# Altium PCB Booster2.PcbDoc (part 2 of 2)
Units mm, origin at the board's own origin, x right, y up, seen from the top; angles counter-clockwise.
Board outline 59.06 x 72.51 mm, 2 copper layers (Top Layer, Bottom Layer); 66 components, 45 nets, 178 pads, 206 vias.
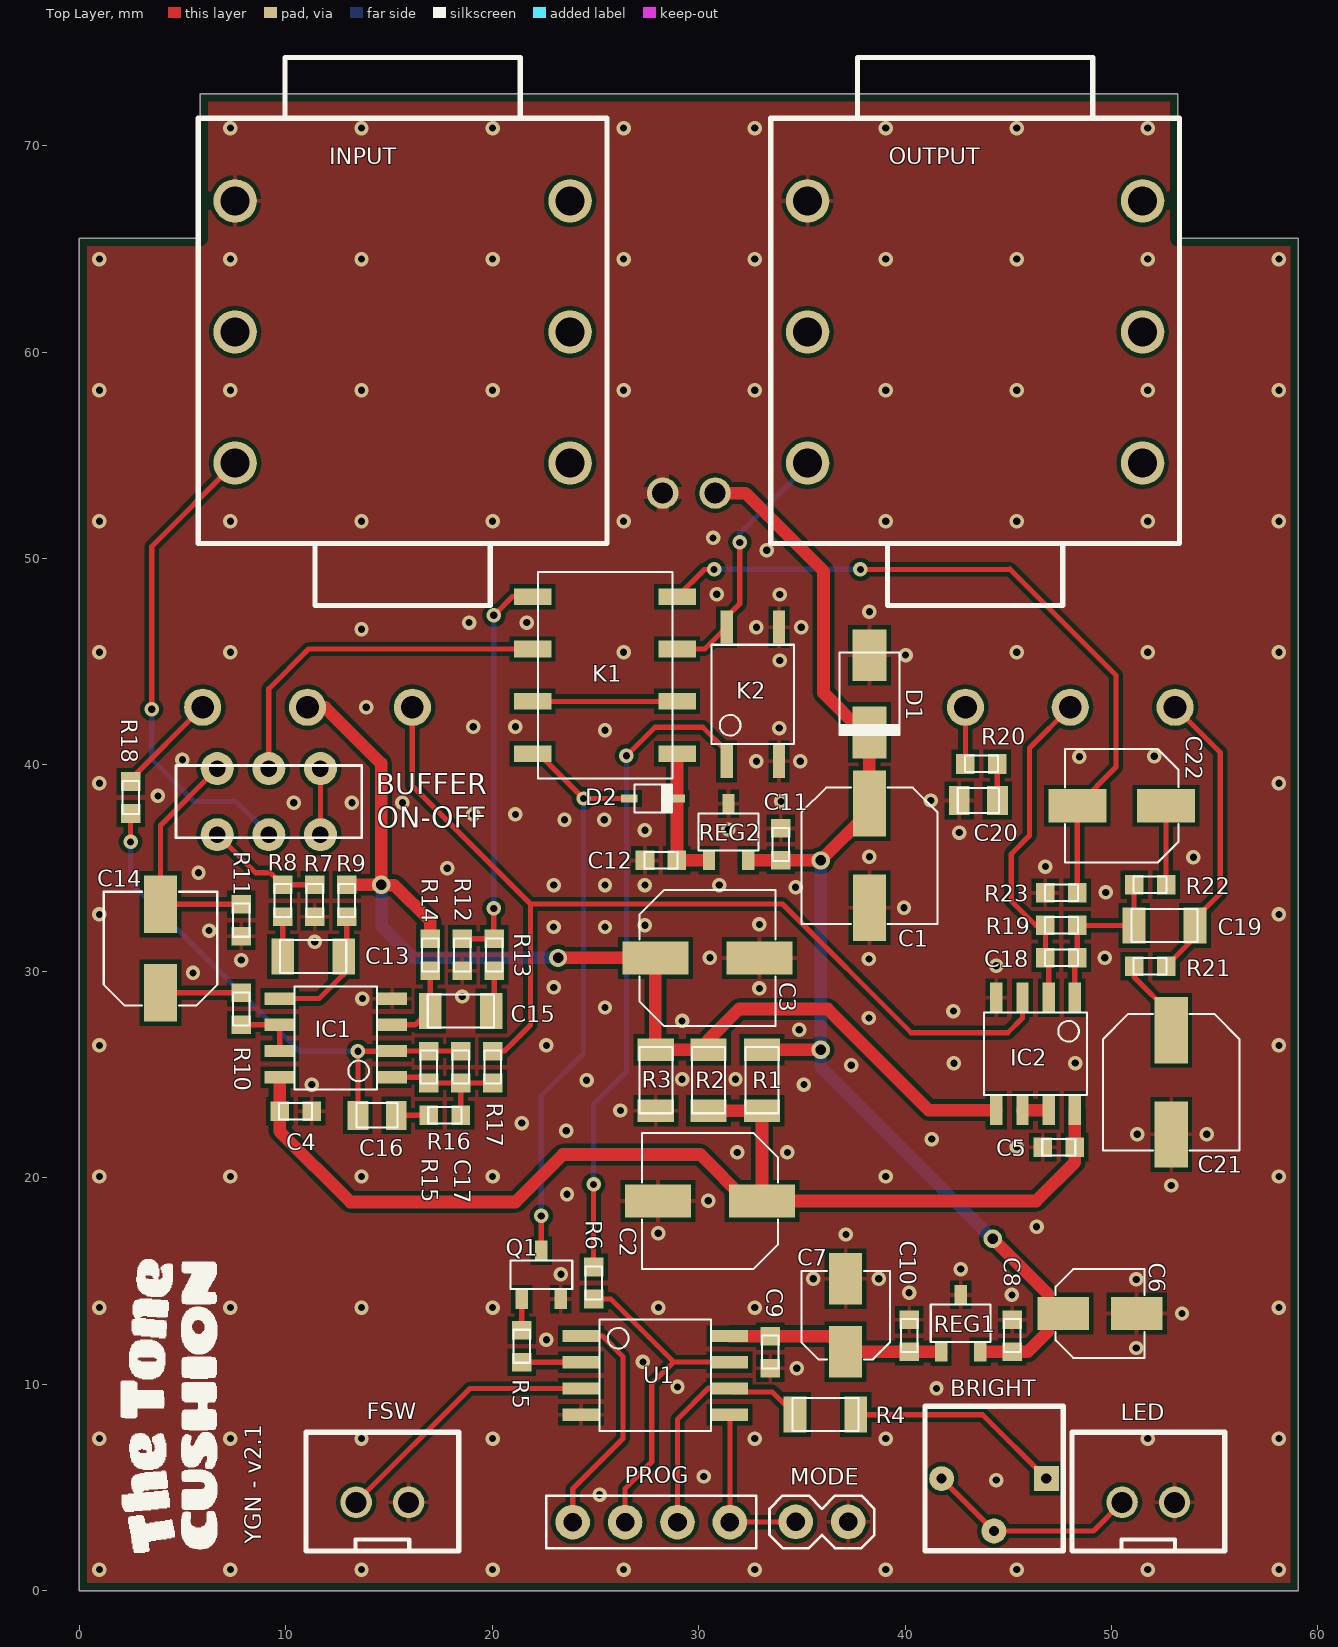
[diagram p0: Top Layer view]

## Part data (continued)
R4: library part CRCW1206220RFKEA, "RES SMD 220 OHM 1% 1/4W 1206", Case/Package=1206, Case Code (Metric)=3216, Manufacturer=Vishay, Max Operating Temperature=155°C, Max Power Dissipation=250mW, Min Operating Temperature=-55°C, Package Quantity=10, Supplier Part Number 1=2139380, Temperature Coefficient=100ppm/°C, Tolerance=1%, Voltage Rating=200V, Case Code (Imperial)=1206, ComponentLink1Description=https://datasheet.ciiva.com/5550/dcrcwe3-109170-5550679.pdf?src-supplier=Mouser, ComponentLink1URL=https://datasheet.ciiva.com/5550/dcrcwe3-109170-5550679.pdf?src-supplier=Mouser, ComponentLink2Description=https://datasheet.ciiva.com/17166/dcrcwe3-17166378.pdf?src-supplier=Avnet+Europe, ComponentLink2URL=https://datasheet.ciiva.com/17166/dcrcwe3-17166378.pdf?src-supplier=Avnet+Europe, ComponentLink3Description=https://datasheet.ciiva.com/2515/dcrcwe3-2515580.pdf?src-supplier=Digi-Key, ComponentLink3URL=https://datasheet.ciiva.com/2515/dcrcwe3-2515580.pdf?src-supplier=Digi-Key, ComponentLink4Description=https://datasheet.ciiva.com/2515/dcrcwe3-2515581.pdf?src-supplier=Digi-Key, ComponentLink4URL=https://datasheet.ciiva.com/2515/dcrcwe3-2515581.pdf?src-supplier=Digi-Key, ComponentLink5Description=https://datasheet.ciiva.com/2515/dcrcwe3-2515582.pdf?src-supplier=Digi-Key, ComponentLink5URL=https://datasheet.ciiva.com/2515/dcrcwe3-2515582.pdf?src-supplier=Digi-Key, ComponentLink6Description=https://datasheet.ciiva.com/8957/dcrcwe3-8957438.pdf?src-supplier=Avnet, ComponentLink6URL=https://datasheet.ciiva.com/8957/dcrcwe3-8957438.pdf?src-supplier=Avnet, ComponentLink7Description=https://datasheet.ciiva.com/22700/1697337-22700367.pdf?src-supplier=Element14, ComponentLink7URL=https://datasheet.ciiva.com/22700/1697337-22700367.pdf?src-supplier=Element14, ComponentLink8Description=https://datasheet.ciiva.com/26317/fld-crcw-e3-data-en-26317129.pdf?src-supplier=Distrelec, ComponentLink8URL=https://datasheet.ciiva.com/26317/fld-crcw-e3-data-en-26317129.pdf?src-supplier=Distrelec, ComponentLink9Description=https://datasheet.ciiva.com/7800/dcrcwe3-7800651.pdf?src-supplier=Element14, ComponentLink9URL=https://datasheet.ciiva.com/7800/dcrcwe3-7800651.pdf?src-supplier=Element14, ComponentLink10Description=https://datasheet.ciiva.com/22675/1912744-22675103.pdf?src-supplier=Element14, ComponentLink10URL=https://datasheet.ciiva.com/22675/1912744-22675103.pdf?src-supplier=Element14, Composition="Thick Film", Contact Plating=Tin, Depth=1.6mm, Features="Automotive AEC-Q200", Height=0.55mm, Lead Free="Lead Free", Length=3.2mm, Manufacturer Part Number=CRCW1206220RFKEA, Military Standard=Not, Mount="Surface Mount", Number of Terminations=2, Packaging="Tape and Reel", Power Rating=250mW, Price=0.028, Pricing="10=0.0415, 100=0.0276, 500=0.0231, 1000=0.0135, 2500=0.0116 (EUR)", Radiation Hardening=No, REACH SVHC=Unknown, Resistance=220R, RoHS=Yes, Stock=47111, Supplier 1=Farnell, Termination=SMD/SMT, Voltage Rating (DC)=200V, Weight=0.000353oz, Width=1.6mm
R5 R18 R19: library part CRCW060320K0FKEA, "RES SMD 20K OHM 1% 1/10W 0603", Case/Package=0603, Case Code (Metric)=1608, Manufacturer=Vishay, Max Operating Temperature=155°C, Min Operating Temperature=-55°C, Package Quantity=5000, Power Rating=100mW, Resistance=20kR, Supplier Part Number 1=1469774, Temperature Coefficient=100ppm/°C, Tolerance=1%, Voltage Rating=75V, Case Code (Imperial)=0603, ComponentLink1Description=https://datasheet.ciiva.com/5549/dcrcwe3-109170-5549626.pdf?src-supplier=Mouser, ComponentLink1URL=https://datasheet.ciiva.com/5549/dcrcwe3-109170-5549626.pdf?src-supplier=Mouser, ComponentLink2Description=https://datasheet.ciiva.com/26314/fld-crcw-e3-data-en-26314665.pdf?src-supplier=Distrelec, ComponentLink2URL=https://datasheet.ciiva.com/26314/fld-crcw-e3-data-en-26314665.pdf?src-supplier=Distrelec, ComponentLink3Description=https://datasheet.ciiva.com/3257/dcrcwe3-3257238.pdf?src-supplier=Avnet, ComponentLink3URL=https://datasheet.ciiva.com/3257/dcrcwe3-3257238.pdf?src-supplier=Avnet, ComponentLink4Description=https://datasheet.ciiva.com/7841/1697337-7841574.pdf?src-supplier=Element14, ComponentLink4URL=https://datasheet.ciiva.com/7841/1697337-7841574.pdf?src-supplier=Element14, ComponentLink5Description=https://datasheet.ciiva.com/3257/dcrcwe3-3257239.pdf?src-supplier=Avnet, ComponentLink5URL=https://datasheet.ciiva.com/3257/dcrcwe3-3257239.pdf?src-supplier=Avnet, ComponentLink6Description=https://datasheet.ciiva.com/16351/dcrcwe3-16351112.pdf?src-supplier=Future+Electronics, ComponentLink6URL=https://datasheet.ciiva.com/16351/dcrcwe3-16351112.pdf?src-supplier=Future+Electronics, ComponentLink7Description=https://datasheet.ciiva.com/16893/dcrcw-16893852.pdf?src-supplier=Avnet+Europe, ComponentLink7URL=https://datasheet.ciiva.com/16893/dcrcw-16893852.pdf?src-supplier=Avnet+Europe, Composition="Thick Film", Contact Plating=Tin, Depth=0.85mm, Height=0.45mm, Lead Free="Lead Free", Length=1.55mm, Manufacturer Part Number=CRCW060320K0FKEA, Military Standard=Not, Mount="Surface Mount", Number of Pins=2, Packaging="Tape and Reel", Price=0.0131, Pricing="10=0.0169, 100=0.013, 500=0.0113, 1000=0.008 (EUR)", Radiation Hardening=No, REACH SVHC=Unknown, RoHS=Yes, Stock=71220, Supplier 1=Farnell, Termination=SMD/SMT, Voltage Rating (DC)=75V, Weight=7.1E-05oz, Width=0.85mm
R6 R10 R22: library part CRCW06031K00FKEA, "RES SMD 1K OHM 1% 1/10W 0603", Case/Package=0603, Case Code (Metric)=1608, Manufacturer="Vishay Dale", Max Operating Temperature=155°C, Max Power Dissipation=100mW, Min Operating Temperature=-55°C, Package Quantity=10, Resistance=1kR, Supplier Part Number 1=1469740, Temperature Coefficient=100ppm/°C, Tolerance=1%, Voltage Rating=75V, Case Code (Imperial)=0603, ComponentLink1Description=https://datasheet.ciiva.com/11808/0900766b80d98afc-11808625.pdf?src-supplier=RSComponents, ComponentLink1URL=https://datasheet.ciiva.com/11808/0900766b80d98afc-11808625.pdf?src-supplier=RSComponents, ComponentLink2Description=https://datasheet.ciiva.com/2465/dcrcwe3-2465536.pdf?src-supplier=Digi-Key, ComponentLink2URL=https://datasheet.ciiva.com/2465/dcrcwe3-2465536.pdf?src-supplier=Digi-Key, ComponentLink3Description=https://datasheet.ciiva.com/8336/dcrcwe3-8336822.pdf?src-supplier=Avnet, ComponentLink3URL=https://datasheet.ciiva.com/8336/dcrcwe3-8336822.pdf?src-supplier=Avnet, ComponentLink4Description=https://datasheet.ciiva.com/16515/dcrcwe3-16515078.pdf?src-supplier=Avnet+Asia, ComponentLink4URL=https://datasheet.ciiva.com/16515/dcrcwe3-16515078.pdf?src-supplier=Avnet+Asia, ComponentLink5Description=https://datasheet.ciiva.com/46441/1720486-46441622.pdf?src-supplier=Element14, ComponentLink5URL=https://datasheet.ciiva.com/46441/1720486-46441622.pdf?src-supplier=Element14, ComponentLink6Description=https://datasheet.ciiva.com/26316/fld-crcw-e3-data-en-26316551.pdf?src-supplier=Distrelec, ComponentLink6URL=https://datasheet.ciiva.com/26316/fld-crcw-e3-data-en-26316551.pdf?src-supplier=Distrelec, ComponentLink7Description=https://datasheet.ciiva.com/46441/1720486-46441623.pdf?src-supplier=Element14, ComponentLink7URL=https://datasheet.ciiva.com/46441/1720486-46441623.pdf?src-supplier=Element14, ComponentLink8Description=https://datasheet.ciiva.com/46385/1697337-46385497.pdf?src-supplier=Element14, ComponentLink8URL=https://datasheet.ciiva.com/46385/1697337-46385497.pdf?src-supplier=Element14, ComponentLink9Description=https://datasheet.ciiva.com/3257/dcrcwe3-3257132.pdf?src-supplier=Avnet, ComponentLink9URL=https://datasheet.ciiva.com/3257/dcrcwe3-3257132.pdf?src-supplier=Avnet, ComponentLink10Description=https://datasheet.ciiva.com/16199/dcrcwe3-16199053.pdf?src-supplier=Future+Electronics, ComponentLink10URL=https://datasheet.ciiva.com/16199/dcrcwe3-16199053.pdf?src-supplier=Future+Electronics, ComponentLink11Description=https://datasheet.ciiva.com/2465/dcrcwe3-2465534.pdf?src-supplier=Digi-Key, ComponentLink11URL=https://datasheet.ciiva.com/2465/dcrcwe3-2465534.pdf?src-supplier=Digi-Key, ComponentLink12Description=https://datasheet.ciiva.com/16893/dcrcwe3-16893742.pdf?src-supplier=Avnet+Europe, ComponentLink12URL=https://datasheet.ciiva.com/16893/dcrcwe3-16893742.pdf?src-supplier=Avnet+Europe, ComponentLink13Description=https://datasheet.ciiva.com/2465/dcrcwe3-2465535.pdf?src-supplier=Digi-Key, ComponentLink13URL=https://datasheet.ciiva.com/2465/dcrcwe3-2465535.pdf?src-supplier=Digi-Key, Composition="Thick Film", Contact Plating=Tin, Depth=0.85mm, Features="Automotive AEC-Q200", Height=0.45mm, Lead Free="Lead Free", Length=1.55mm, Manufacturer Part Number=CRCW06031K00FKEA, Military Standard=Not, Mount="Surface Mount", Number of Pins=2, Number of Terminations=2, Packaging="Tape and Reel", Power Rating=100mW, Price=0.013, Pricing="10=0.017, 100=0.0131, 500=0.0114, 1000=0.008, 2500=0.0061 (EUR)", Radiation Hardening=No, REACH SVHC=Unknown, RoHS=Yes, Stock=1083345, Supplier 1=Farnell, Termination=SMD/SMT, Voltage Rating (DC)=75V, Weight=7.1E-05oz, Width=0.033inch
R7 R9 R12 R14: library part CRCW06032M20FKEA, "RES SMD 2.2M OHM 1% 1/10W 0603", Case/Package=0603, Case Code (Metric)=1608, Manufacturer=Vishay, Max Operating Temperature=155°C, Max Power Dissipation=100mW, Min Operating Temperature=-55°C, Package Quantity=10, Resistance=2.2MR, Supplier Part Number 1=2138646, Temperature Coefficient=100ppm/°C, Tolerance=1%, Voltage Rating=75V, Case Code (Imperial)=0603, ComponentLink1Description=https://datasheet.ciiva.com/11810/0900766b80d98afc-11810588.pdf?src-supplier=RSComponents, ComponentLink1URL=https://datasheet.ciiva.com/11810/0900766b80d98afc-11810588.pdf?src-supplier=RSComponents, ComponentLink2Description=https://datasheet.ciiva.com/2466/dcrcwe3-2466118.pdf?src-supplier=Digi-Key, ComponentLink2URL=https://datasheet.ciiva.com/2466/dcrcwe3-2466118.pdf?src-supplier=Digi-Key, ComponentLink3Description=https://datasheet.ciiva.com/22682/1912744-22682662.pdf?src-supplier=Element14, ComponentLink3URL=https://datasheet.ciiva.com/22682/1912744-22682662.pdf?src-supplier=Element14, ComponentLink4Description=https://datasheet.ciiva.com/7801/1697337-7801067.pdf?src-supplier=Element14, ComponentLink4URL=https://datasheet.ciiva.com/7801/1697337-7801067.pdf?src-supplier=Element14, ComponentLink5Description=https://datasheet.ciiva.com/22869/70201119-22869819.pdf?src-supplier=Allied+Electronics, ComponentLink5URL=https://datasheet.ciiva.com/22869/70201119-22869819.pdf?src-supplier=Allied+Electronics, ComponentLink6Description=https://datasheet.ciiva.com/26314/fld-crcw-e3-data-en-26314653.pdf?src-supplier=Distrelec, ComponentLink6URL=https://datasheet.ciiva.com/26314/fld-crcw-e3-data-en-26314653.pdf?src-supplier=Distrelec, ComponentLink7Description=https://datasheet.ciiva.com/3257/dcrcwe3-3257407.pdf?src-supplier=Avnet, ComponentLink7URL=https://datasheet.ciiva.com/3257/dcrcwe3-3257407.pdf?src-supplier=Avnet, ComponentLink8Description=https://datasheet.ciiva.com/2466/dcrcwe3-2466116.pdf?src-supplier=Digi-Key, ComponentLink8URL=https://datasheet.ciiva.com/2466/dcrcwe3-2466116.pdf?src-supplier=Digi-Key, ComponentLink9Description=https://datasheet.ciiva.com/2466/dcrcwe3-2466117.pdf?src-supplier=Digi-Key, ComponentLink9URL=https://datasheet.ciiva.com/2466/dcrcwe3-2466117.pdf?src-supplier=Digi-Key, ComponentLink10Description=https://datasheet.ciiva.com/16498/dcrcwe3-16498313.pdf?src-supplier=Future+Electronics, ComponentLink10URL=https://datasheet.ciiva.com/16498/dcrcwe3-16498313.pdf?src-supplier=Future+Electronics, ComponentLink11Description=https://datasheet.ciiva.com/7801/1697337-7801066.pdf?src-supplier=Element14, ComponentLink11URL=https://datasheet.ciiva.com/7801/1697337-7801066.pdf?src-supplier=Element14, Composition="Thick Film", Contact Plating=Tin, Depth=0.85mm, Features="Automotive AEC-Q200", Height=0.45mm, Lead Free="Lead Free", Length=1.55mm, Manufacturer Part Number=CRCW06032M20FKEA, Military Standard=Not, Mount="Surface Mount", Number of Pins=2, Number of Terminations=2, Packaging="Tape and Reel", Power Rating=100mW, Price=0.0165, Pricing="10=0.0212, 100=0.0163, 500=0.0141, 1000=0.0073 (EUR)", Radiation Hardening=No, REACH SVHC=Unknown, RoHS=Yes, Stock=19125, Supplier 1=Farnell, Termination=SMD/SMT, Voltage Rating (DC)=75V, Weight=7.1E-05oz, Width=0.85mm
R8 R13: library part CRCW060310K0FKEA, "RES SMD 10K OHM 1% 1/10W 0603", Case/Package=0603, Case Code (Metric)=1608, Manufacturer=Vishay, Max Operating Temperature=155°C, Max Power Dissipation=100mW, Min Operating Temperature=-55°C, Package Quantity=10, Resistance=10kR, Supplier Part Number 1=1469748, Temperature Coefficient=100ppm/°C, Tolerance=1%, Voltage Rating=75V, Case Code (Imperial)=0603, ComponentLink1Description=https://datasheet.ciiva.com/11809/0900766b80d98afc-11809037.pdf?src-supplier=RSComponents, ComponentLink1URL=https://datasheet.ciiva.com/11809/0900766b80d98afc-11809037.pdf?src-supplier=RSComponents, ComponentLink2Description=https://datasheet.ciiva.com/16886/dcrcw-16886037.pdf?src-supplier=Avnet+Europe, ComponentLink2URL=https://datasheet.ciiva.com/16886/dcrcw-16886037.pdf?src-supplier=Avnet+Europe, ComponentLink3Description=https://datasheet.ciiva.com/26821/getdatasheetpartid-86831-26821109.pdf?src-supplier=Verical, ComponentLink3URL=https://datasheet.ciiva.com/26821/getdatasheetpartid-86831-26821109.pdf?src-supplier=Verical, ComponentLink4Description=https://datasheet.ciiva.com/16754/70201119-16754710.pdf?src-supplier=Allied+Electronics, ComponentLink4URL=https://datasheet.ciiva.com/16754/70201119-16754710.pdf?src-supplier=Allied+Electronics, ComponentLink5Description=https://datasheet.ciiva.com/16719/70201119-16719704.pdf?src-supplier=Allied+Electronics, ComponentLink5URL=https://datasheet.ciiva.com/16719/70201119-16719704.pdf?src-supplier=Allied+Electronics, ComponentLink6Description=https://datasheet.ciiva.com/2465/dcrcwe3-2465513.pdf?src-supplier=Digi-Key, ComponentLink6URL=https://datasheet.ciiva.com/2465/dcrcwe3-2465513.pdf?src-supplier=Digi-Key, ComponentLink7Description=https://datasheet.ciiva.com/5543/dcrcwe3-109170-5543001.pdf?src-supplier=Mouser, ComponentLink7URL=https://datasheet.ciiva.com/5543/dcrcwe3-109170-5543001.pdf?src-supplier=Mouser, ComponentLink8Description=https://datasheet.ciiva.com/2465/dcrcwe3-2465514.pdf?src-supplier=Digi-Key, ComponentLink8URL=https://datasheet.ciiva.com/2465/dcrcwe3-2465514.pdf?src-supplier=Digi-Key, ComponentLink9Description=https://datasheet.ciiva.com/46385/1697337-46385498.pdf?src-supplier=Element14, ComponentLink9URL=https://datasheet.ciiva.com/46385/1697337-46385498.pdf?src-supplier=Element14, ComponentLink10Description=https://datasheet.ciiva.com/2465/dcrcwe3-2465515.pdf?src-supplier=Digi-Key, ComponentLink10URL=https://datasheet.ciiva.com/2465/dcrcwe3-2465515.pdf?src-supplier=Digi-Key, ComponentLink11Description=https://datasheet.ciiva.com/3256/dcrcwe3-3256939.pdf?src-supplier=Avnet, ComponentLink11URL=https://datasheet.ciiva.com/3256/dcrcwe3-3256939.pdf?src-supplier=Avnet, ComponentLink12Description=https://datasheet.ciiva.com/3256/dcrcwe3-3256940.pdf?src-supplier=Avnet, ComponentLink12URL=https://datasheet.ciiva.com/3256/dcrcwe3-3256940.pdf?src-supplier=Avnet, ComponentLink13Description=https://datasheet.ciiva.com/16209/dcrcwe3-16209164.pdf?src-supplier=Future+Electronics, ComponentLink13URL=https://datasheet.ciiva.com/16209/dcrcwe3-16209164.pdf?src-supplier=Future+Electronics, ComponentLink14Description=https://datasheet.ciiva.com/26314/fld-crcw-e3-data-en-26314749.pdf?src-supplier=Distrelec, ComponentLink14URL=https://datasheet.ciiva.com/26314/fld-crcw-e3-data-en-26314749.pdf?src-supplier=Distrelec, Composition="Thick Film", Contact Plating=Tin, Depth=0.85mm, Features="Automotive AEC-Q200", Height=0.45mm, Lead Free="Lead Free", Length=1.55mm, Manufacturer Part Number=CRCW060310K0FKEA, Military Standard=Not, Number of Pins=2, Number of Terminations=2, Packaging="Tape and Reel", Power Rating=100mW, Price=0.0131, Pricing="10=0.0169, 100=0.013, 500=0.0113, 1000=0.008 (EUR)", Radiation Hardening=No, REACH SVHC=Unknown, RoHS=Yes, Stock=1391124, Supplier 1=Farnell, Termination=SMD/SMT, Voltage Rating (DC)=75V, Weight=7.1E-05oz, Width=0.033inch
R11 R16 R23: library part CRCW0603100KFKEA, "RES SMD 100K OHM 1% 1/10W 0603", Case/Package=0603, Case Code (Metric)=1608, Manufacturer=Vishay, Max Operating Temperature=155°C, Max Power Dissipation=100mW, Min Operating Temperature=-55°C, Package Quantity=10, Resistance=100kR, Supplier Part Number 1=1469649, Temperature Coefficient=100ppm/°C, Tolerance=1%, Voltage Rating=75V, Case Code (Imperial)=0603, ComponentLink1Description=https://datasheet.ciiva.com/11809/0900766b80d98afc-11809004.pdf?src-supplier=RSComponents, ComponentLink1URL=https://datasheet.ciiva.com/11809/0900766b80d98afc-11809004.pdf?src-supplier=RSComponents, ComponentLink2Description=https://datasheet.ciiva.com/2465/dcrcwe3-2465525.pdf?src-supplier=Digi-Key, ComponentLink2URL=https://datasheet.ciiva.com/2465/dcrcwe3-2465525.pdf?src-supplier=Digi-Key, ComponentLink3Description=https://datasheet.ciiva.com/7777/1697337-7777269.pdf?src-supplier=Element14, ComponentLink3URL=https://datasheet.ciiva.com/7777/1697337-7777269.pdf?src-supplier=Element14, ComponentLink4Description=https://datasheet.ciiva.com/15159/getdatasheetpartid-93113-15159925.pdf?src-supplier=Verical, ComponentLink4URL=https://datasheet.ciiva.com/15159/getdatasheetpartid-93113-15159925.pdf?src-supplier=Verical, ComponentLink5Description=https://datasheet.ciiva.com/46441/1720486-46441605.pdf?src-supplier=Element14, ComponentLink5URL=https://datasheet.ciiva.com/46441/1720486-46441605.pdf?src-supplier=Element14, ComponentLink6Description=https://datasheet.ciiva.com/2465/dcrcwe3-2465526.pdf?src-supplier=Digi-Key, ComponentLink6URL=https://datasheet.ciiva.com/2465/dcrcwe3-2465526.pdf?src-supplier=Digi-Key, ComponentLink7Description=https://datasheet.ciiva.com/2465/dcrcwe3-2465527.pdf?src-supplier=Digi-Key, ComponentLink7URL=https://datasheet.ciiva.com/2465/dcrcwe3-2465527.pdf?src-supplier=Digi-Key, ComponentLink8Description=https://datasheet.ciiva.com/8340/dcrcwe3-8340199.pdf?src-supplier=Avnet, ComponentLink8URL=https://datasheet.ciiva.com/8340/dcrcwe3-8340199.pdf?src-supplier=Avnet, ComponentLink9Description=https://datasheet.ciiva.com/16725/70201119-16725223.pdf?src-supplier=Allied+Electronics, ComponentLink9URL=https://datasheet.ciiva.com/16725/70201119-16725223.pdf?src-supplier=Allied+Electronics, ComponentLink10Description=https://datasheet.ciiva.com/8340/dcrcwe3-8340201.pdf?src-supplier=Avnet, ComponentLink10URL=https://datasheet.ciiva.com/8340/dcrcwe3-8340201.pdf?src-supplier=Avnet, ComponentLink11Description=https://datasheet.ciiva.com/7791/66915-7791994.pdf?src-supplier=Element14, ComponentLink11URL=https://datasheet.ciiva.com/7791/66915-7791994.pdf?src-supplier=Element14, ComponentLink12Description=https://datasheet.ciiva.com/5545/dcrcwe3-109170-5545100.pdf?src-supplier=Mouser, ComponentLink12URL=https://datasheet.ciiva.com/5545/dcrcwe3-109170-5545100.pdf?src-supplier=Mouser, ComponentLink13Description=https://datasheet.ciiva.com/26317/fld-crcw-e3-data-en-26317165.pdf?src-supplier=Distrelec, ComponentLink13URL=https://datasheet.ciiva.com/26317/fld-crcw-e3-data-en-26317165.pdf?src-supplier=Distrelec, ComponentLink14Description=https://datasheet.ciiva.com/16941/dcrcw-16941311.pdf?src-supplier=Avnet+Europe, ComponentLink14URL=https://datasheet.ciiva.com/16941/dcrcw-16941311.pdf?src-supplier=Avnet+Europe, Composition="Thick Film", Contact Plating=Tin, Depth=0.85mm, Features="Automotive AEC-Q200", Height=0.45mm, Lead Free="Lead Free", Length=1.55mm, Manufacturer Part Number=CRCW0603100KFKEA, Military Standard=Not, Number of Pins=2, Number of Terminations=2, Packaging="Tape and Reel", Power Rating=100mW, Price=0.0136, Pricing="10=0.0169, 100=0.013, 500=0.0113, 1000=0.0068 (EUR)", Radiation Hardening=No, REACH SVHC=Unknown, RoHS=Yes, Stock=573766, Supplier 1=Farnell, Termination=SMD/SMT, Voltage Rating (DC)=75V, Weight=7.1E-05oz, Width=0.033inch
R15: library part CRCW0603330KFKEA, "RES SMD 330K OHM 1% 1/10W 0603", Case/Package=0603, Case Code (Metric)=1608, Manufacturer=Vishay, Max Operating Temperature=155°C, Max Power Dissipation=100mW, Min Operating Temperature=-55°C, Package Quantity=10, Resistance=330kR, Supplier Part Number 1=2138547, Temperature Coefficient=100ppm/°C, Tolerance=1%, Voltage Rating=75V, Case Code (Imperial)=0603, ComponentLink1Description=https://datasheet.ciiva.com/11810/0900766b80d98afc-11810796.pdf?src-supplier=RSComponents, ComponentLink1URL=https://datasheet.ciiva.com/11810/0900766b80d98afc-11810796.pdf?src-supplier=RSComponents, ComponentLink2Description=https://datasheet.ciiva.com/16778/70201119-16778744.pdf?src-supplier=Allied+Electronics, ComponentLink2URL=https://datasheet.ciiva.com/16778/70201119-16778744.pdf?src-supplier=Allied+Electronics, ComponentLink3Description=https://datasheet.ciiva.com/22708/1697337-22708424.pdf?src-supplier=Element14, ComponentLink3URL=https://datasheet.ciiva.com/22708/1697337-22708424.pdf?src-supplier=Element14, ComponentLink4Description=https://datasheet.ciiva.com/2465/dcrcwe3-2465930.pdf?src-supplier=Digi-Key, ComponentLink4URL=https://datasheet.ciiva.com/2465/dcrcwe3-2465930.pdf?src-supplier=Digi-Key, ComponentLink5Description=https://datasheet.ciiva.com/2465/dcrcwe3-2465931.pdf?src-supplier=Digi-Key, ComponentLink5URL=https://datasheet.ciiva.com/2465/dcrcwe3-2465931.pdf?src-supplier=Digi-Key, ComponentLink6Description=https://datasheet.ciiva.com/2465/dcrcwe3-2465932.pdf?src-supplier=Digi-Key, ComponentLink6URL=https://datasheet.ciiva.com/2465/dcrcwe3-2465932.pdf?src-supplier=Digi-Key, ComponentLink7Description=https://datasheet.ciiva.com/7792/125364-7792220.pdf?src-supplier=Element14, ComponentLink7URL=https://datasheet.ciiva.com/7792/125364-7792220.pdf?src-supplier=Element14, ComponentLink8Description=https://datasheet.ciiva.com/16203/dcrcwe3-16203007.pdf?src-supplier=Future+Electronics, ComponentLink8URL=https://datasheet.ciiva.com/16203/dcrcwe3-16203007.pdf?src-supplier=Future+Electronics, ComponentLink9Description=https://datasheet.ciiva.com/7673/1697337-7673301.pdf?src-supplier=Element14, ComponentLink9URL=https://datasheet.ciiva.com/7673/1697337-7673301.pdf?src-supplier=Element14, ComponentLink10Description=https://datasheet.ciiva.com/7673/1697337-7673302.pdf?src-supplier=Element14, ComponentLink10URL=https://datasheet.ciiva.com/7673/1697337-7673302.pdf?src-supplier=Element14, ComponentLink11Description=https://datasheet.ciiva.com/26317/fld-crcw-e3-data-en-26317177.pdf?src-supplier=Distrelec, ComponentLink11URL=https://datasheet.ciiva.com/26317/fld-crcw-e3-data-en-26317177.pdf?src-supplier=Distrelec, ComponentLink12Description=https://datasheet.ciiva.com/22870/70201119-22870764.pdf?src-supplier=Allied+Electronics, ComponentLink12URL=https://datasheet.ciiva.com/22870/70201119-22870764.pdf?src-supplier=Allied+Electronics, Composition="Thick Film", Contact Plating=Tin, Depth=0.85mm, Features="Automotive AEC-Q200", Height=0.45mm, Lead Free="Lead Free", Length=1.55mm, Manufacturer Part Number=CRCW0603330KFKEA, Military Standard=Not, Mount="Surface Mount", Number of Pins=2, Number of Terminations=2, Packaging="Tape and Reel", Power Rating=100mW, Price=0.0165, Pricing="10=0.0212, 100=0.0163, 500=0.0141, 1000=0.0073 (EUR)", Radiation Hardening=No, REACH SVHC=Unknown, RoHS=Yes, Stock=25517, Supplier 1=Farnell, Termination=SMD/SMT, Voltage Rating (DC)=75V, Weight=7.1E-05oz, Width=0.85mm, Working Voltage=75V
R17: library part CRCW060347K0FKEA, "RES SMD 47K OHM 1% 1/10W 0603", Case/Package=0603, Case Code (Metric)=1608, Manufacturer=Vishay, Max Operating Temperature=155°C, Min Operating Temperature=-55°C, Package Quantity=5000, Power Rating=100mW, Resistance=47kR, Supplier Part Number 1=1469811, Temperature Coefficient=100ppm/°C, Tolerance=1%, Voltage Rating=75V, Case Code (Imperial)=0603, ComponentLink1Description=https://datasheet.ciiva.com/11808/0900766b80d98afc-11808694.pdf?src-supplier=RSComponents, ComponentLink1URL=https://datasheet.ciiva.com/11808/0900766b80d98afc-11808694.pdf?src-supplier=RSComponents, ComponentLink2Description=https://datasheet.ciiva.com/16763/70201119-16763141.pdf?src-supplier=Allied+Electronics, ComponentLink2URL=https://datasheet.ciiva.com/16763/70201119-16763141.pdf?src-supplier=Allied+Electronics, ComponentLink3Description=https://datasheet.ciiva.com/16893/dcrcwe3-16893430.pdf?src-supplier=Avnet+Europe, ComponentLink3URL=https://datasheet.ciiva.com/16893/dcrcwe3-16893430.pdf?src-supplier=Avnet+Europe, ComponentLink4Description=https://datasheet.ciiva.com/5548/dcrcwe3-109170-5548727.pdf?src-supplier=Mouser, ComponentLink4URL=https://datasheet.ciiva.com/5548/dcrcwe3-109170-5548727.pdf?src-supplier=Mouser, ComponentLink5Description=https://datasheet.ciiva.com/3257/dcrcwe3-3257631.pdf?src-supplier=Avnet, ComponentLink5URL=https://datasheet.ciiva.com/3257/dcrcwe3-3257631.pdf?src-supplier=Avnet, ComponentLink6Description=https://datasheet.ciiva.com/16286/dcrcwe3-16286447.pdf?src-supplier=Future+Electronics, ComponentLink6URL=https://datasheet.ciiva.com/16286/dcrcwe3-16286447.pdf?src-supplier=Future+Electronics, ComponentLink7Description=https://datasheet.ciiva.com/7777/1720486-7777607.pdf?src-supplier=Element14, ComponentLink7URL=https://datasheet.ciiva.com/7777/1720486-7777607.pdf?src-supplier=Element14, ComponentLink8Description=https://datasheet.ciiva.com/7777/125364-7777562.pdf?src-supplier=Element14, ComponentLink8URL=https://datasheet.ciiva.com/7777/125364-7777562.pdf?src-supplier=Element14, Composition="Thick Film", Contact Plating=Tin, Depth=0.85mm, Height=0.45mm, Lead Free="Lead Free", Length=1.55mm, Manufacturer Part Number=CRCW060347K0FKEA, Military Standard=Not, Mount="Surface Mount", Packaging="Tape and Reel", Price=0.0131, Pricing="10=0.018, 100=0.0139, 500=0.012, 1000=0.008 (EUR)", Radiation Hardening=No, REACH SVHC=Unknown, RoHS=Yes, Stock=204361, Supplier 1=Farnell, Termination=SMD/SMT, Voltage Rating (DC)=75V, Weight=7.1E-05oz, Width=0.85mm
R20 R21: library part CRCW06033K30FKEA, "RES SMD 3.3K OHM 1% 1/10W 0603", Case/Package=0603, Case Code (Metric)=1608, Manufacturer=Vishay, Max Operating Temperature=155°C, Max Power Dissipation=100mW, Min Operating Temperature=-55°C, Package Quantity=10, Resistance=3.3kR, Supplier Part Number 1=1469793, Temperature Coefficient=100ppm/°C, Tolerance=1%, Voltage Rating=75V, Case Code (Imperial)=0603, ComponentLink1Description=https://datasheet.ciiva.com/11808/0900766b80d98afc-11808705.pdf?src-supplier=RSComponents, ComponentLink1URL=https://datasheet.ciiva.com/11808/0900766b80d98afc-11808705.pdf?src-supplier=RSComponents, ComponentLink2Description=https://datasheet.ciiva.com/26314/fld-crcw-e3-data-en-26314711.pdf?src-supplier=Distrelec, ComponentLink2URL=https://datasheet.ciiva.com/26314/fld-crcw-e3-data-en-26314711.pdf?src-supplier=Distrelec, ComponentLink3Description=https://datasheet.ciiva.com/7672/1720486-7672906.pdf?src-supplier=Element14, ComponentLink3URL=https://datasheet.ciiva.com/7672/1720486-7672906.pdf?src-supplier=Element14, ComponentLink4Description=https://datasheet.ciiva.com/7673/1720486-7673146.pdf?src-supplier=Element14, ComponentLink4URL=https://datasheet.ciiva.com/7673/1720486-7673146.pdf?src-supplier=Element14, ComponentLink5Description=https://datasheet.ciiva.com/16200/dcrcwe3-16200585.pdf?src-supplier=Future+Electronics, ComponentLink5URL=https://datasheet.ciiva.com/16200/dcrcwe3-16200585.pdf?src-supplier=Future+Electronics, ComponentLink6Description=https://datasheet.ciiva.com/16893/dcrcw-16893324.pdf?src-supplier=Avnet+Europe, ComponentLink6URL=https://datasheet.ciiva.com/16893/dcrcw-16893324.pdf?src-supplier=Avnet+Europe, Composition="Thick Film", Contact Plating=Tin, Depth=0.85mm, Features="Automotive AEC-Q200", Height=0.45mm, Lead Free="Lead Free", Length=1.55mm, Manufacturer Part Number=CRCW06033K30FKEA, Military Standard=Not, Mount="Surface Mount", Number of Terminations=2, Packaging="Tape and Reel", Power Rating=100mW, Price=0.0131, Pricing="10=0.0171, 100=0.0132, 500=0.0114, 1000=0.0068 (EUR)", Radiation Hardening=No, REACH SVHC=Unknown, RoHS=Yes, Stock=173901, Supplier 1=Farnell, Termination=SMD/SMT, Voltage Rating (DC)=75V, Weight=7.1E-05oz, Width=0.85mm, Working Voltage=75V
REG1 REG2: library part TS78L05CXRFG, "TAIWAN SEMICONDUCTOR - TS78L05CX RFG - REG 3-TERMINAL 100MA, SMD, SOT23-3", Case/Package=SOT-23, Manufacturer="Taiwan Semiconductor", Max Input Voltage=35V, Max Operating Temperature=125°C, Min Input Voltage=0uV, Min Operating Temperature=0°C, Nominal Output Voltage=5V, Output Current=100mA, Supplier Part Number 1=1476698, ComponentLink1Description=http://www.farnell.com/datasheets/2044138.pdf?src-supplier=Farnell, ComponentLink1URL=http://www.farnell.com/datasheets/2044138.pdf?src-supplier=Farnell, ComponentLink2Description=http://www.farnell.com/datasheets/4546.pdf?src-supplier=Element14, ComponentLink2URL=http://www.farnell.com/datasheets/4546.pdf?src-supplier=Element14, ComponentLink3Description=http://www.taiwansemi.com/products/datasheet/TS78L00_I15.pdf?src-supplier=Digi-Key, ComponentLink3URL=http://www.taiwansemi.com/products/datasheet/TS78L00_I15.pdf?src-supplier=Digi-Key, Manufacturer Part Number=TS78L05CXRFG, Number of Outputs=1, Number of Pins=3, Packaging="Cut Tape", Price=0.262, Pricing="5=0.101, 50=0.099, 100=0.097, 250=0.0949, 500=0.0929, 1000=0.0909, 5000=0.0889, 10000=0.0869 (EUR)", REACH SVHC="No SVHC", RoHS=Yes, Stock=0, Supplier 1=Farnell
TONE: library part POT_100kB_ALPHA_16mm, "100k Lin potentiometer round shaft", Package="PCB Mounted", Dimensions=16mm, Price=0.5
U1: library part ATTINY85-20SU, "IC, 8BIT MCU, AVR TINY, 20MHZ, 8-SOIC", Case/Package=SOIC, Frequency=20MHz, Manufacturer="Microchip / Atmel", Max Operating Temperature=85°C, Max Supply Voltage=5.5V, Min Operating Temperature=-40°C, Min Supply Voltage=2.7V, Package Quantity=95, Supplier Part Number 1=1455164, Access Time=20us, ComponentLink1Description=https://datasheet.ciiva.com/1167/1698186-1167152.pdf?src-supplier=Newark, ComponentLink1URL=https://datasheet.ciiva.com/1167/1698186-1167152.pdf?src-supplier=Newark, ComponentLink2Description=https://datasheet.ciiva.com/15122/getdatasheetpartid-131914-15122511.pdf?src-supplier=Verical, ComponentLink2URL=https://datasheet.ciiva.com/15122/getdatasheetpartid-131914-15122511.pdf?src-supplier=Verical, ComponentLink3Description=https://datasheet.ciiva.com/26207/doc2586-26207573.pdf?src-supplier=Avnet+Europe, ComponentLink3URL=https://datasheet.ciiva.com/26207/doc2586-26207573.pdf?src-supplier=Avnet+Europe, ComponentLink4Description=https://datasheet.ciiva.com/28653/1698186-28653829.pdf?src-supplier=Element14, ComponentLink4URL=https://datasheet.ciiva.com/28653/1698186-28653829.pdf?src-supplier=Element14, ComponentLink5Description=https://datasheet.ciiva.com/3203/doc2586-3203150.pdf?src-supplier=Avnet, ComponentLink5URL=https://datasheet.ciiva.com/3203/doc2586-3203150.pdf?src-supplier=Avnet, Contact Plating=Tin, Core Architecture=AVR, Data Bus Width=8b, Density=8KB, Height=1.91mm, Interface=SPI, Lead Free="Lead Free", Length=5.35mm, Manufacturer Part Number=ATTINY85-20SU, Max Frequency=20MHz, Memory Size=8KB, Memory Type=FLASH, Mount="Surface Mount", Number of ADC Channels=4, Number of I2C Channels=1, Number of I/Os=6, Number of Pins=8, Number of Programmable I/O=6, Number of PWM Channels=6, Number of SPI Channels=1, Number of Timers/Counters=2, Number of UART Channels=1, Oscillator Type=Internal, Packaging=Rail/Tube, Peripherals="Brown-out Detect/Reset", Price=0.98, Pricing="1=0.972, 25=0.925, 100=0.894, 1000=0.862 (EUR)", Radiation Hardening=No, RAM Size=512B, REACH SVHC="No SVHC", RoHS=Yes, Stock=2172, Supplier 1=Farnell, Termination=SMD/SMT, Watchdog Timer=Yes, Width=5.4mm

## Via types
v1: diameter 0.7, hole 0.35, Top Layer to Bottom Layer, tented both sides, 149 vias
v2: diameter 0.7, hole 0.35, Top Layer to Bottom Layer, 52 vias
v3: diameter 0.889, hole 0.508, Top Layer to Bottom Layer, 5 vias

## Nets (pads, with @x,y where several pads share a name; then routed paths per layer and width w, separated by ;. In a path a pad name is that pad's centre, name@x,y a point inside that pad or via, vN(x,y) a via of type N, cw(c..) or ccw(c..) an arc to the next point about the centre after c; other vN are vias at no path point)
+5V: C7.+ C9.1 C10.1 REG1.1 U1.8 | length 10.6
  Top Layer w0.61: U1.8 33.47,12.33 C9.1 36.363,12.325 C7.+ 37.135,11.573 C10.1 REG1.1
+9V: C1.+ C6.+ C8.1 C11.1 D1.1 DC.1 R1.1 REG1.2 REG2.2 | length 61.1
  Top Layer w0.61: DC.1 32.268,53.175 36.05,49.393 36.05,43.5 37.951,41.599 D1.1@38.275,41.599 ; REG2.2 C11.1 v3(35.915,35.375) 38.275,37.735 C1.+ D1.1 ; R1.1 v3(35.915,26.2) ; REG1.2 C8.1 45.948,11.573 46.925,12.55 C6.+@46.925,13.4 ; v3(44.25,17.05) 46.925,14.375 C6.+@46.925,13.4 ; C6.+ 46.948,13.423 C6.+@46.925,13.4
  Bottom Layer w0.61: v3(35.915,35.375) v3(35.915,26.2) 35.915,25.356 44.25,17.022 v3(44.25,17.05)
BUFFEROUT: BUFFER.A2 K1.6 | length 17.5
  Top Layer w0.254: BUFFER.A2 9.175,43.697 11.098,45.62 K1.6
GND: C1.- C2.- C3.- C4.2 C5.2 C6.- C7.- C8.2 C9.2 C10.2 C11.2 C12.2 C20.2 C21.- D1.2 DC.2 FSW.2 IC1.4 IC2.4 INPUT.S K2.3 K2.4 LED.2 MODE.1 OUTPUT.S Q1.2 R3.1 R7.1 R11.1 R12.1 R23.1 REG1.3 REG2.3 U1.4
  other v1: 25.2,4.643 44.42,5.35 30.25,5.525 7.315,7.362 13.665,7.362 20.015,7.362 32.715,7.362 39.065,7.362 51.765,7.362 41.525,9.79 28.975,9.863 34.75,10.775 27.3,11.075 51.205,11.75 22.625,12.15 53.421,13.423 7.315,13.712 13.665,13.712 20.015,13.712 28.053,13.712 32.715,13.712 45.182,14.323 40.198,14.425 51.205,15.075 35.55,15.107 38.725,15.107 23.325,15.325 42.7,15.575 37.135,17.25 28.044,17.312 46.375,17.625 30.465,18.887 23.623,19.2 52.9,19.625 7.315,20.062 13.665,20.062 20.015,20.062 39.065,20.062 31.875,21.225 34.3,21.225 45.415,21.49 41.3,21.875 51.25,22.104 54.625,22.104 23.584,22.275 21.425,22.65 26.212,23.258 11.25,24.516 35.1,24.516 24.573,24.725 29.2,24.775 31.787,24.775 37.4,25.447 42.37,25.55 48.25,25.558 22.623,26.412 34.875,27.175 29.2,27.6 38.25,27.74 42.343,28.075 25.464,28.25 13.708,28.68 18.55,28.782 32.946,29.175 22.985,29.225 5.5,29.923 44.42,30.275 7.838,30.548 38.25,30.6 30.549,30.662 49.675,30.656 11.4,31.425 6.278,31.975 22.971,32.15 25.464,32.15 27.4,32.232 32.946,32.275 39.95,33.082 49.725,33.825 34.7,34.075 22.985,34.183 25.464,34.183 27.4,34.183 31.004,34.183 5.768,34.775 17.822,35 46.803,35.075 53.975,35.525 38.275,35.55 42.629,36.725 27.4,36.839 31.433,36.875 23.5,37.35 25.431,37.35 19.075,37.602 21.125,37.602 10.384,38.175 13.2,38.175 15.65,38.175 33.99,38.237 41.25,38.279 3.8,38.5 32.8,40.178 34.925,40.178 4.985,40.25 48.45,40.4 52.075,40.425 25.464,41.682 33.91,41.787 19.075,41.85 21.125,41.85 13.9,42.795 33.925,45.062 40.025,45.325 7.315,45.462 26.365,45.462 45.415,45.462 51.765,45.462 13.665,46.573 32.8,46.675 34.975,46.675 18.875,46.9 21.675,46.9 38.275,47.425 33.925,48.262 30.875,48.275 33.297,50.4 30.7,51 7.315,51.812 13.665,51.812 20.015,51.812 26.365,51.812 39.065,51.812 45.415,51.812 51.765,51.812 7.315,58.162 13.665,58.162 20.015,58.162 26.365,58.162 32.715,58.162 39.065,58.162 45.415,58.162 51.765,58.162 13.665,64.512 20.015,64.512 26.365,64.512 32.715,64.512 39.065,64.512 45.415,64.512
  other v2: 0.965,1.012 7.315,1.012 13.665,1.012 20.015,1.012 26.365,1.012 32.715,1.012 39.065,1.012 45.415,1.012 51.765,1.012 58.115,1.012 0.965,7.362 58.115,7.362 0.965,13.712 58.115,13.712 0.965,20.062 58.115,20.062 0.965,26.412 58.115,26.412 0.965,32.762 58.115,32.762 0.965,39.112 58.115,39.112 0.965,45.462 58.115,45.462 0.965,51.812 58.115,51.812 0.965,58.162 58.115,58.162 0.965,64.512 7.315,64.512 51.765,64.512 58.115,64.512 7.315,70.862 13.665,70.862 20.015,70.862 26.365,70.862 32.715,70.862 39.065,70.862 45.415,70.862 51.765,70.862
INPUT: BUFFER.B2 INPUT.T | length 23.2
  Top Layer w0.254: v2(3.5,42.7) 3.5,50.59 INPUT.T
  Bottom Layer w0.254: v2(3.5,42.7) 3.5,40.275 5.55,38.225 7.575,38.225 BUFFER.B2
NetBRIGHT_1: BRIGHT.1 R4.2 | length 10.5
  Top Layer w0.254: R4.2 43.755,8.52 BRIGHT.1
NetBRIGHT_2: BRIGHT.2 BRIGHT.3 LED.1 | length 10.4
  Top Layer w0.254: BRIGHT.3 BRIGHT.2 49.127,2.885 LED.1
NetBUFFER_A1: BUFFER.A1 C14.- R11.2 | length 11.6
  Top Layer w0.254: BUFFER.A1 3.925,37.075 C14.- R11.2
NetBUFFER_A3: BUFFER.A3 BUFFER.B3 | length 3.2
  Top Layer w0.254: BUFFER.B3 BUFFER.A3
NetBUFFER_B1: BUFFER.B1 R7.2 R8.1 | length 5.7
  Top Layer w0.254: BUFFER.B1 8.525,34.775 9.25,34.775 9.825,34.2 R8.1 R7.2
NetC12_1: C12.1 D2.1 K1.1 REG2.1 | length 6.7
  Top Layer w0.61: K1.1@28.95,40.534 D2.1 C12.1 REG2.1
NetC13_1: C13.1 IC1.5 R9.1 | length 6.4
  Top Layer w0.254: IC1.5 11.621,28.68 12.8,29.859 C13.1 12.95,30.875 R9.1
NetC13_2: C13.2 R8.2 | length 1.9
  Top Layer w0.254: C13.2 R8.2
NetC14_+: C14.+ R10.2 | length 3.9
  Top Layer w0.254: C14.+ R10.2
NetC15_1: C15.1 IC1.3 R14.1 | length 4
  Top Layer w0.254: IC1.3 16.26,27.41 17,28.15 R14.1
NetC15_2: C15.2 R13.2 | length 2
  Top Layer w0.254: C15.2 20.1,28.225 R13.2
NetC16_1: C16.1 R16.1 | length 1.6
  Top Layer w0.254: C16.1 R16.1
NetC16_2: C16.2 C17.2 IC1.2 R15.1 R18.1 | length 25.8
  Top Layer w0.254: v2(2.475,36.275) R18.1 ; C16.2 v2(13.492,26.132) 15.142,26.132 IC1.2 R15.1 C17.2
  Bottom Layer w0.254: v2(2.475,36.275) 2.475,34.315 10.658,26.132 v2(13.492,26.132)
NetC17_1: C17.1 IC1.1 R15.2 R16.2 R17.1 | length 6.6
  Top Layer w0.254: IC1.1 16.645,24.87 R15.2 C17.1 ; R16.2 C17.1 ; R17.1 C17.1
NetC18_1: C18.1 C19.1 IC2.1 R19.2 R22.1 | length 8.3
  Top Layer w0.254: IC2.1 48.23,30.536 48.35,30.656 R19.2 51.098,32.227 51.1,32.23 R22.1
NetC18_2: C18.2 IC2.2 R19.1 TONE.2 | length 16.3
  Top Layer w0.254: IC2.2 46.96,30.496 C18.2 46.803,32.224 R19.1 46.795,32.232 46.332,32.232 45.15,33.414 45.15,35.692 46.034,36.577 46.034,40.823 TONE.2
NetC19_2: C19.2 R21.1 TONE.1 | length 14.5
  Top Layer w0.254: R21.1 54.05,31.65 C19.2 54.05,32.55 55.275,33.775 55.275,40.606 TONE.1
NetC20_1: C20.1 R20.1 | length 1.8
  Top Layer w0.254: R20.1 44.475,38.279 C20.1
NetC21_+: C21.+ R21.2 | length 3.3
  Top Layer w0.254: 51.1,29.725 52.9,27.925 C21.+
NetC22_+: C22.+ R22.2 | length 3.8
  Top Layer w0.254: C22.+ 52.647,34.203 R22.2
NetD2_2: D2.2 K1.8 Q1.3 | length 28.3
  Top Layer w0.254: K1.8 22.26,40.54 v2(24.425,38.375) D2.2 ; Q1.3 v2(22.375,18.15)
  Bottom Layer w0.254: v2(22.375,18.15) 22.375,23.972 24.425,26.022 v2(24.425,38.375)
NetIC1_6: IC1.6 IC1.7 R10.1 | length 3.1
  Top Layer w0.254: R10.1 IC1.6 IC1.7
NetIC2_3: IC2.3 LEVEL.1 R17.2 | length 47.8
  Top Layer w0.254: LEVEL.1 16.129,38.984 21.85,33.263 ; R17.2 20.59,26.14 21.85,27.4 21.85,33.263 ; IC2.3 45.69,27.74 44.975,27.025 40.3,27.025 34.062,33.263 21.85,33.263
NetIC2_6: IC2.6 IC2.7 | length 1.3
  Top Layer w0.61: IC2.6 IC2.7
NetK1_2: K1.2 K1.7 | length 7
  Top Layer w0.254: K1.7 K1.2
NetK2_1: K2.1 R6.2 | length 31.8
  Top Layer w0.254: v2(24.91,19.675) 24.91,15.69 R6.2 ; v2(26.5,40.45) 27.881,41.831 30.199,41.831 31.355,40.675 K2.1
  Bottom Layer w0.254: v2(24.91,19.675) 24.91,23.564 26.5,25.155 v2(26.5,40.45)
NetLEVEL_3: LEVEL.3 R18.2 | length 5
  Top Layer w0.254: R18.2 2.475,39.301 LEVEL.3
NetQ1_1: Q1.1 R5.2 | length 1.5
  Top Layer w0.254: R5.2 Q1.1
NetR20_2: R20.2 TONE.3 | length 2.7
  Top Layer w0.254: R20.2 42.926,40.051 TONE.3
OUTPUT: K1.3 K2.6 OUTPUT.T | length 12.4
  Top Layer w0.254: K1.3 30.3,45.62 K2.6 31.355,47.175 31.997,47.817 v2(31.997,50.785)
  Bottom Layer w0.254: v2(31.997,50.785) 31.997,51.225 35.283,54.512 OUTPUT.T
PB0: MODE.2 PROG.4 U1.5 | length 8.4
  Top Layer w0.254: U1.5 31.515,8.505 PROG.4 34.695,3.315 MODE.2
PB1: PROG.3 R4.1 U1.6 | length 11.8
  Top Layer w0.254: PROG.3 28.975,8.3 30.48,9.805 U1.6@31.5,9.805 ; U1.6 31.665,9.625 33.564,9.625 R4.1
PB2: PROG.2 R6.1 U1.7 | length 16.3
  Top Layer w0.254: R6.1 25.745,14.125 28.795,11.075 ; PROG.2 26.435,4.932 27.725,6.222 27.725,10.004 28.795,11.075 ; U1.7@31.2,11.075 28.795,11.075
PB3: R5.1 U1.2 | length 2.9
  Top Layer w0.254: R5.1 U1.2
PB4: FSW.1 U1.3 | length 13.2
  Top Layer w0.254: FSW.1 18.922,9.79 U1.3
PB5: PROG.1 U1.1 | length 11.5
  Top Layer w0.254: PROG.1 23.895,4.92 26.335,7.36 26.335,11.33 25.335,12.33 U1.1
RETURN: C22.- K1.4 R23.2 | length 35.3
  Top Layer w0.254: K1.4 30.276,49.475 v2(30.75,49.475) ; v2(37.84,49.475) 45.05,49.475 45.075,49.5 50.225,44.35 50.225,39.897 C22.- 48.35,38.022 R23.2
  Bottom Layer w0.254: v2(30.75,49.475) 30.763,49.487 37.828,49.487 v2(37.84,49.475)
SEND: K1.5 R12.2 R13.1 | length 19.5
  Top Layer w0.254: R12.2 R13.1 20.075,31.6 v2(20.075,33.05) ; v2(20.075,47.25) 20.985,48.16 K1.5
  Bottom Layer w0.254: v2(20.075,33.05) v2(20.075,47.25)
Vb: C3.+ IC2.5 LEVEL.2 R2.2 R3.2 R9.2 R14.2 | length 56.2
  Top Layer w0.61: LEVEL.2 11.898,42.795 14.614,40.079 v3(14.614,34.2) ; R9.2 v3(14.614,34.2) ; R14.2 17,32.431 15.248,34.183 14.631,34.183 v3(14.614,34.2) ; v3(23.187,30.65) C3.+ R3.2@27.904,26.221 ; R3.2 R2.2 30.475,26.686 31.964,28.175 36.246,28.175 41.146,23.275 IC2.5
  Bottom Layer w0.61: v3@14.639,34.2 14.639,32.186 16.175,30.65 v3(23.187,30.65)
Vr: C2.+ C4.1 C5.1 IC1.8 IC2.8 R1.2 R2.1 | length 54.7
  Top Layer w0.61: IC1.8 C4.1 9.7,22.25 13.125,18.825 21.125,18.825 23.425,21.125 30.08,21.125 32.33,18.875 C2.+ ; R2.1 R1.2@33.068,23.25 ; R1.2@33.071,23.246 C2.+ ; IC2.8 48.23,21.48 C5.1 48.225,20.746 46.354,18.875 C2.+
pads on no net: INPUT.R INPUT.RN INPUT.SN INPUT.TN OUTPUT.R OUTPUT.RN OUTPUT.SN OUTPUT.TN

## Polygon pours and split planes (outlines as drawn)
GND on Top Layer "GND_L01_P010" (solid, pour order 10): 0,0 59.055,0 59.055,65.528 53.204,65.528 53.204,72.513 5.85,72.513 5.85,65.528 0,65.528
GND on Bottom Layer "GND_L02_P008" (solid, pour order 8): 0,0 59.055,0 59.055,65.401 59.182,65.528 53.204,65.528 53.204,72.513 5.85,72.513 5.85,65.528 0,65.528

## Keep-outs
Keep-Out Layer:
  lines w0.025: 14.991,0 0,0 0,65.528 5.85,65.528 5.85,72.513 53.205,72.513 53.205,65.528 59.055,65.528 59.055,0 44.518,0 ; 15.016,0 44.544,0

## Silkscreen, mask and mechanical layers (free items; w line width, h text height)
Top Overlay:
  drawing of 14 lines, arcs and shapes, not listed
  text "ON-OFF" at 14.4,36.95 h1
  text "YGN - v2.1" at 8.8,2.264 h0.8 r90
Mechanical 3:
  lines w2: -1,7.362 -1,0 ; -1,13.712 -1,51.812 ; -1,58.162 -1,65.528 ; 60.055,7.362 60.055,0 ; 60.055,13.712 60.055,51.812 ; 60.055,58.162 60.055,65.528 ; -1,0 ccw(c0,0) 0,-1 ; -1,0 ccw(c0,0) 0,-1 ; -1,65.528 cw(c0,65.528) 0,66.528 ; -1,65.528 cw(c0,65.528) 0,66.528 ; 0,-1 59.055,-1 ; 0,66.528 4.85,66.528 4.85,72.513 ; 4.85,72.513 cw(c5.85,72.513) 5.85,73.513 ; 4.85,72.513 cw(c5.85,72.513) 5.85,73.513 ; 5.85,73.513 53.204,73.513 ; 53.204,73.513 cw(c53.204,72.513) 54.204,72.513 ; 53.204,73.513 cw(c53.204,72.513) 54.204,72.513 ; 54.204,72.513 54.204,66.528 59.055,66.528 ; 59.055,-1 ccw(c59.055,0) 60.055,0 ; 59.055,-1 ccw(c59.055,0) 60.055,0 ; 59.055,66.528 cw(c59.055,65.528) 60.055,65.528 ; 59.055,66.528 cw(c59.055,65.528) 60.055,65.528
Route Tool Path:
  lines w2: -1,7.367 -1,0.005 ; -1,13.717 -1,51.817 ; -1,58.167 -1,65.533 ; 60.055,7.367 60.055,0.005 ; 60.055,13.717 60.055,51.817 ; 60.055,58.167 60.055,65.533 ; -1,0.005 ccw(c0,0.005) 0,-0.995 ; -1,0.005 ccw(c0,0.005) 0,-0.995 ; -1,65.533 cw(c0,65.533) 0,66.533 ; -1,65.533 cw(c0,65.533) 0,66.533 ; 0,-0.995 59.055,-0.995 ; 0,66.533 4.85,66.533 4.85,72.518 ; 4.85,72.518 cw(c5.85,72.518) 5.85,73.518 ; 4.85,72.518 cw(c5.85,72.518) 5.85,73.518 ; 5.85,73.518 53.204,73.518 ; 53.204,73.518 cw(c53.204,72.518) 54.204,72.518 ; 53.204,73.518 cw(c53.204,72.518) 54.204,72.518 ; 54.204,72.518 54.204,66.533 59.055,66.533 ; 59.055,-0.995 ccw(c59.055,0.005) 60.055,0.005 ; 59.055,-0.995 ccw(c59.055,0.005) 60.055,0.005 ; 59.055,66.533 cw(c59.055,65.533) 60.055,65.533 ; 59.055,66.533 cw(c59.055,65.533) 60.055,65.533